# Altium PCB buckboost fixed.PcbDoc
Units mil, origin at the board's own origin, x right, y up, seen from the top; angles counter-clockwise.
Board outline 1027 x 966 mil, 2 copper layers (Top Layer, Bottom Layer); 10 components, 7 nets, 27 pads, 0 vias.
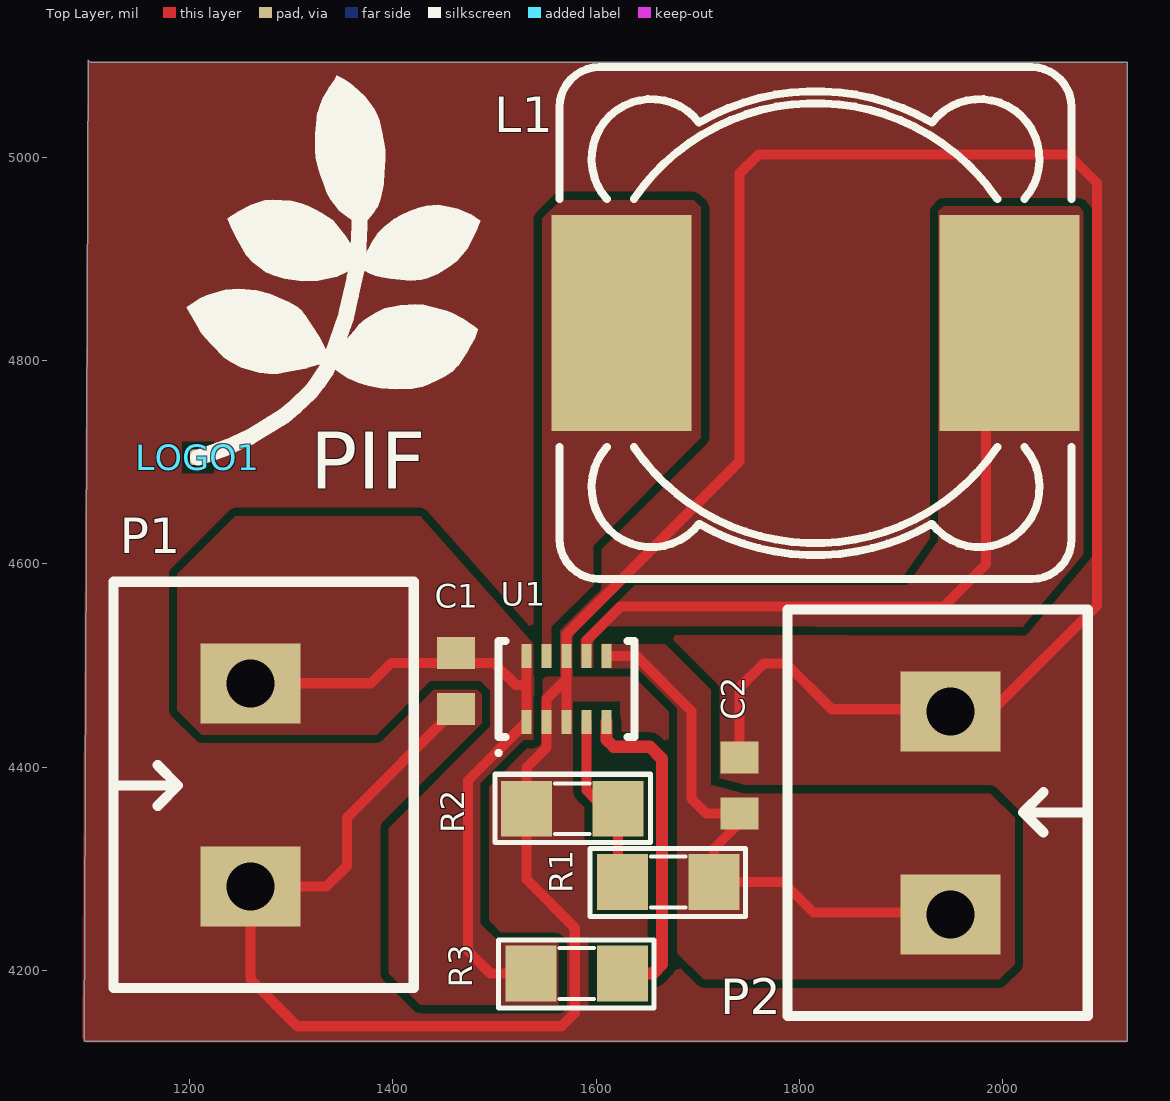
[diagram p0: Top Layer view]
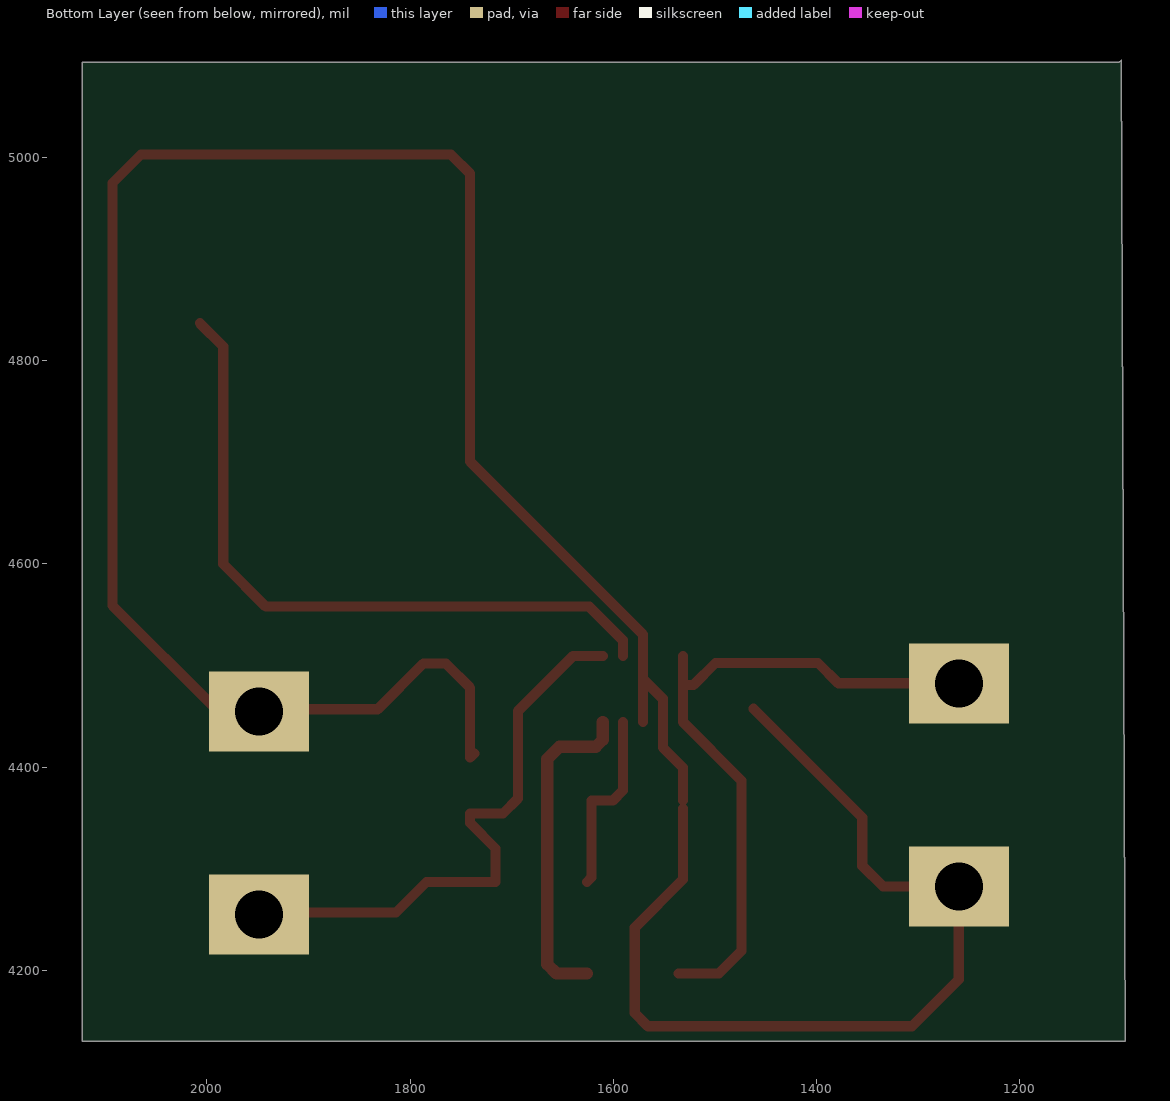
[diagram p1: Bottom Layer view, seen from below]
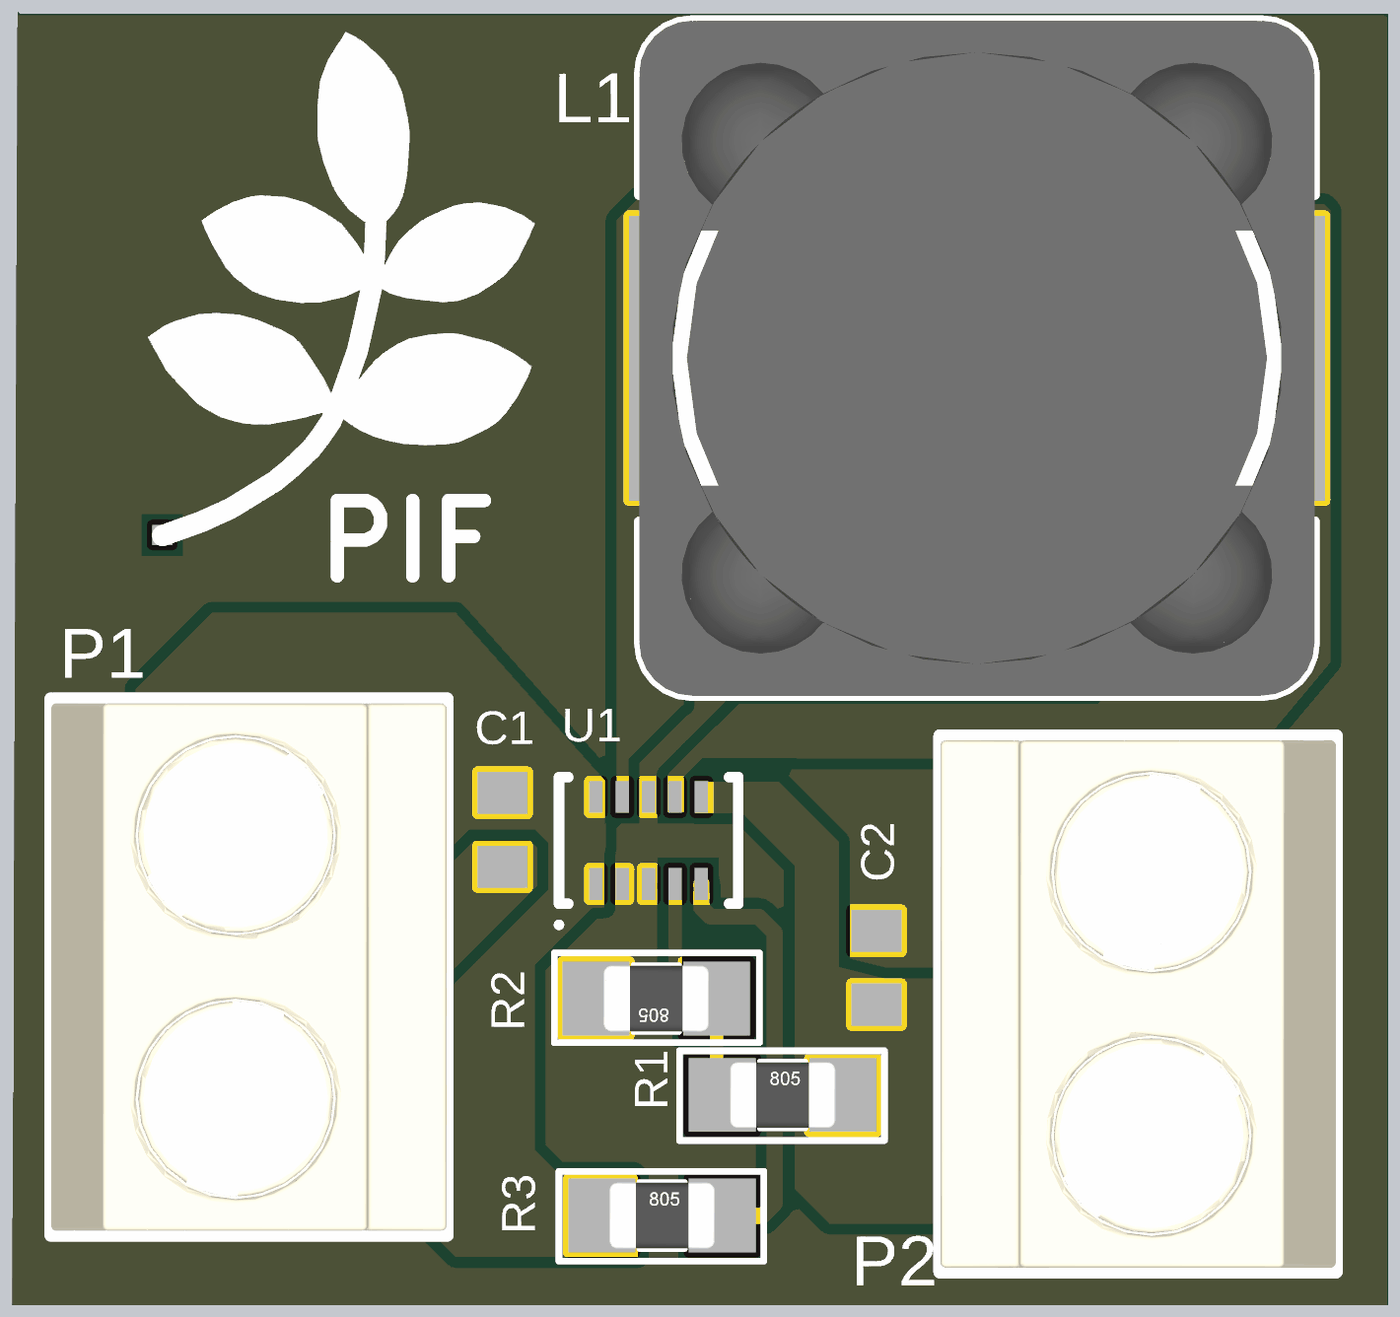
[diagram p2: 3D render of the assembled board from above, using the file's embedded part models]

## Layer stack, top to bottom
Top Solder: solder mask 0.4, Solder Resist, Dk 3.5
Top Layer: signal copper 1.4
Dielectric 1: dielectric 12.6, FR-4, Dk 4.8
Bottom Layer: signal copper 1.4
Bottom Solder: solder mask 0.4, Solder Resist, Dk 3.5

## Board outline
1100,5096 1102,5094 2123,5094 2123,4130 1096,4130

## Design rules (kind name [scope] priority, off if disabled: settings)
Clearance [All] p1: gap=8 ignorepadtopadclearanceinfootprint=FALSE except(0: Arc-Hole Track-Hole SMDPad-Hole THPad-Hole Via-Hole Fill-Hole Poly-Hole Region-Hole Text-Hole)
PlaneClearance [All] p1: clearance=1
PolygonConnect [All] p1: connectstyle=Direct reliefconductorwidth=10 reliefentries=4 polygonreliefangle="90 Angle" airgapwidth=10
RoutingVias [All] p1: holewidth=28 width=50 viastyle="Through Hole" minholewidth=28 minwidth=50 maxholewidth=28 maxwidth=50
SolderMaskExpansion [All] p1: expansion=4
Width [All] p1: maxlimit=100 minlimit=5 preferedwidth=12
29 further rules are at their usual default settings.

## Components (designator, comment, footprint, x,y, rotation, side; value= is the part's Value field where it differs from the comment)
C1 "Cap Non-Pol SMD" CAP-SM-0603 1462,4485 r90 top value=10uF/50V
C2 "Cap Non-Pol SMD" CAP-SM-0603 1741,4382 r270 top value=22uF/50V
L1 "Inductor" "INDUCTOR 12.5x12.5" 1816,4837 r180 top value=0.47uH/5A
LOGO1 "LOGO PIF" "PIF LOGO BIG SSTOP" 1197,4691 r0 top
P1 "Domino 2" "DOMINO 2- 5mm" 1260,4382.5 r90 top
P2 "Domino 2" "DOMINO 2- 5mm" 1949,4355 r270 top
R1 "RESISTOR SMD" RES-SM-0805 1626,4287 r0 top value=511k
R2 "RESISTOR SMD" RES-SM-0805 1621.63,4359 r180 top value=91k
R3 "RESISTOR SMD" RES-SM-0805 1536,4197 r0 top value=100k
U1 "TPS63802" TPS63802 1571,4477 r90 top

## Footprints (in the part's own frame and the unit in brackets; to place one, negate y for a bottom-side part, rotate by r counter-clockwise, add the part's x,y. Pads: shape width x height; smd on the part's side, far side on the other; paste and mask are expansions set on the pad)
CAP-SM-0603 [mm] "SMD Ceramic Capacitor Size 0603"
  rect 0.8x0.95 smd: 1(-0.7,0) 2(0.7,0)
  body extent -0.85,-0.45 0.85,0.45, height 0.6
"DOMINO 2- 5mm" [mm]
  rect 2x2.5 hole 1.2: 1(-2.54,0) 2(2.54,0)
  silkscreen extent -5.08,-4.08 5.08,3.43, body extent -5,-4.07 5,3.43, height 10
"INDUCTOR 12.5x12.5" [mm] "SMD Inductor  Body Width 12.5mm Body Lenght 12.5mm Height 8mm"
  rect 3.5x5.4 smd: 1(-4.85,0) 2(4.85,0)
  silkscreen extent -6.4,-6.4 6.4,6.4, body extent -6.4,-6.4 6.4,6.4, height 8
"PIF LOGO BIG SSTOP" [mil]
  rect 15x15 smd: 1(11,14)
  silkscreen extent 0,14 289,389
RES-SM-0805 [mil]
  rect 50x55 smd: 1(0,0) 2(90,0)
  silkscreen extent -32,-34 121,33, body extent 6,-25 84,25, height 31
TPS63802 [mm] "SON, 10-Leads, Body 3,00x2,00mm, Pitch 0,50mm, IPC Medium Density"
  rect 0.6x0.25 smd: 1(-0.825,1) 2(-0.825,0.5) 3(-0.825,0) 4(-0.825,-0.5) 5(-0.825,-1) 6(0.825,-1) 7(0.825,-0.5) 8(0.825,0) 9(0.825,0.5) 10(0.825,1)
  silkscreen extent -1.65,-1.7 1.2,1.75, body extent -1.05,-1.55 1.05,1.55, height 1

## Part data
C1 C2: "Capacitor"
P1 P2: "Domino, 2-Pin", LatestRevisionDate=17-Jul-2002, LatestRevisionNote="Re-released for DXP Platform.", Publisher="Altium Limited"
R1 R2 R3: "Resistor"
U1: "SMD"

## Nets (pads, with @x,y where several pads share a name; then routed paths per layer and width w, separated by ;. In a path a pad name is that pad's centre, name@x,y a point inside that pad or via, vN(x,y) a via of type N, cw(c..) or ccw(c..) an arc to the next point about the centre after c; other vN are vias at no path point)
GND: C1.1 C2.1 P1.1 P2.1 R2.2 U1.2 U1.3 U1.8 | length 2988.4
  Top Layer w10: C1.1 1355,4350.44 1355,4303 1334.5,4282.5 P1.1 1260,4191 1306,4145 1566,4145 1579,4158 1579,4242 1531.63,4289.37 R2.2 ; R2.2@1531.63,4367 1531.63,4399.63 1551.31,4419.31 U1.2 1551.31,4467.31 1571,4487 ; U1.3 1571,4487 ; C2.1@1737,4413.56 C2.1 1741,4478 1765,4502 1787,4502 1832,4457 1991,4457 2093,4559 2093,4975 2065,5003 1760,5003 1741,4984 1741,4700.68 1571,4530.68 U1.8 1571,4487
NetC1_2: C1.2 P1.2 R3.1 U1.1 U1.10 | length 674.3
  Top Layer w10: P1.2 1378.5,4482.5 1398.56,4502.56 1460,4502.56 1499.44,4502.56 1521,4481 1531.63,4481 ; U1.10 1531.63,4481 ; R3.1 1496,4197 1474,4219 1474,4386.89 U1.1 1531.63,4481
NetL1_1: L1.1 U1.7 | length 686.4
  Top Layer w10: U1.7 1590.68,4524.91 1623.77,4558 1942,4558 1983.94,4599.94 1983.94,4814 L1.1
NetL1_2: L1.2 U1.9
NetR1_1: R1.1 R2.1 U1.4 | length 184.4
  Top Layer w10: U1.4 1590.68,4377 1600.68,4367 1621.63,4367 1621.63,4291.37 R1.1
NetR3_2: R3.2 U1.5 | length 324.7
  Top Layer w12: U1.5 1610.37,4427 1617.37,4420 1653,4420 1665,4408 1665,4206 1656,4197 R3.2
Vout: C2.2 P2.2 R1.2 U1.6 | length 545.4
  Top Layer w10: U1.6 1639.52,4509.48 1694,4455 1694,4369 1708.56,4354.44 C2.2 1741,4345 1716,4320 R1.2 1784,4287 1814,4257 P2.2@1926,4257
pads on no net: LOGO1.1

## Polygon pours and split planes (outlines as drawn)
GND on Top Layer "Top Layer-GND" (solid, pour order 52): 1100,5093 2119,5093 2122,5096 2122,4129 1095,4129 1094,4130
NetC1_2 on Top Layer "Top Layer-NetC1_2" (solid, pour order 48): 1427,4647 1245,4647 1188,4590 1188,4456 1212,4432 1384,4432 1437,4485 1486,4485 1496,4475 1496,4440 1396,4340 1396,4197 1427,4166 1563,4166 1563,4226 1560,4229 1503,4229 1486,4246 1486,4384 1528.44,4426.44 1539,4427 1539,4521
Vout on Top Layer "Top Layer-Vout" (solid, pour order 44): 1615.37,4521.37 1615.74,4521 1668.2,4521 1713,4476.2 1713,4382.5 1747,4374 1988,4374 2012,4350 2012,4206 1997,4191 1706,4191 1680,4217 1680,4458 1640.63,4497.37 1605.5,4497.37 1605.5,4521.37
NetL1_1 on Top Layer "Top Layer-NetL1_1" (solid, pour order 40): 1585,4526 1638,4579 1906.43,4579 1937,4622.78 1937,4947 1942,4952 2075,4952 2080,4947 2080,4610 2019.28,4537.5 1611.49,4538.49 1597,4524 1597,4498 1585,4498
NetL1_2 on Top Layer "Top Layer-NetL1_2" (solid, pour order 38): 1547,4725 1547,4940 1565,4958 1696,4958 1703,4951 1703,4724 1597,4618 1597,4578 1596,4578 1556,4538 1556,4498 1547,4498
no net on Top Layer "Top Layer-No Net 2" (solid, pour order 26): 1536,4432
no net on Top Layer "Top Layer-No Net 3" (solid, pour order 24): 1526,4521.37
no net on Top Layer "Top Layer-No Net 4" (solid, pour order 22): 1531.63,4521.37
no net on Top Layer "Top Layer-No Net 5" (solid, pour order 20): 1521,4521.37
no net on Top Layer "Top Layer-No Net" (solid, pour order 14): 1316,4692
no net on Top Layer "Top Layer-No Net 1" (solid, pour order 8): 1171,4652

## Text inside footprints (layer, text, board x,y; h text height)
LOGO1: Top Overlay "PIF" at 1318.67,4674 h56.25